# Altium PCB omnibothub-core.PcbDoc (part 2 of 2)
Units mil, origin at the board's own origin, x right, y up, seen from the top; angles counter-clockwise.
Board outline 2561.98 x 2230.57 mil, 4 copper layers (Top Layer, Mid-Layer 1, Mid-Layer 2, Bottom Layer); 77 components, 73 nets, 319 pads, 135 vias.
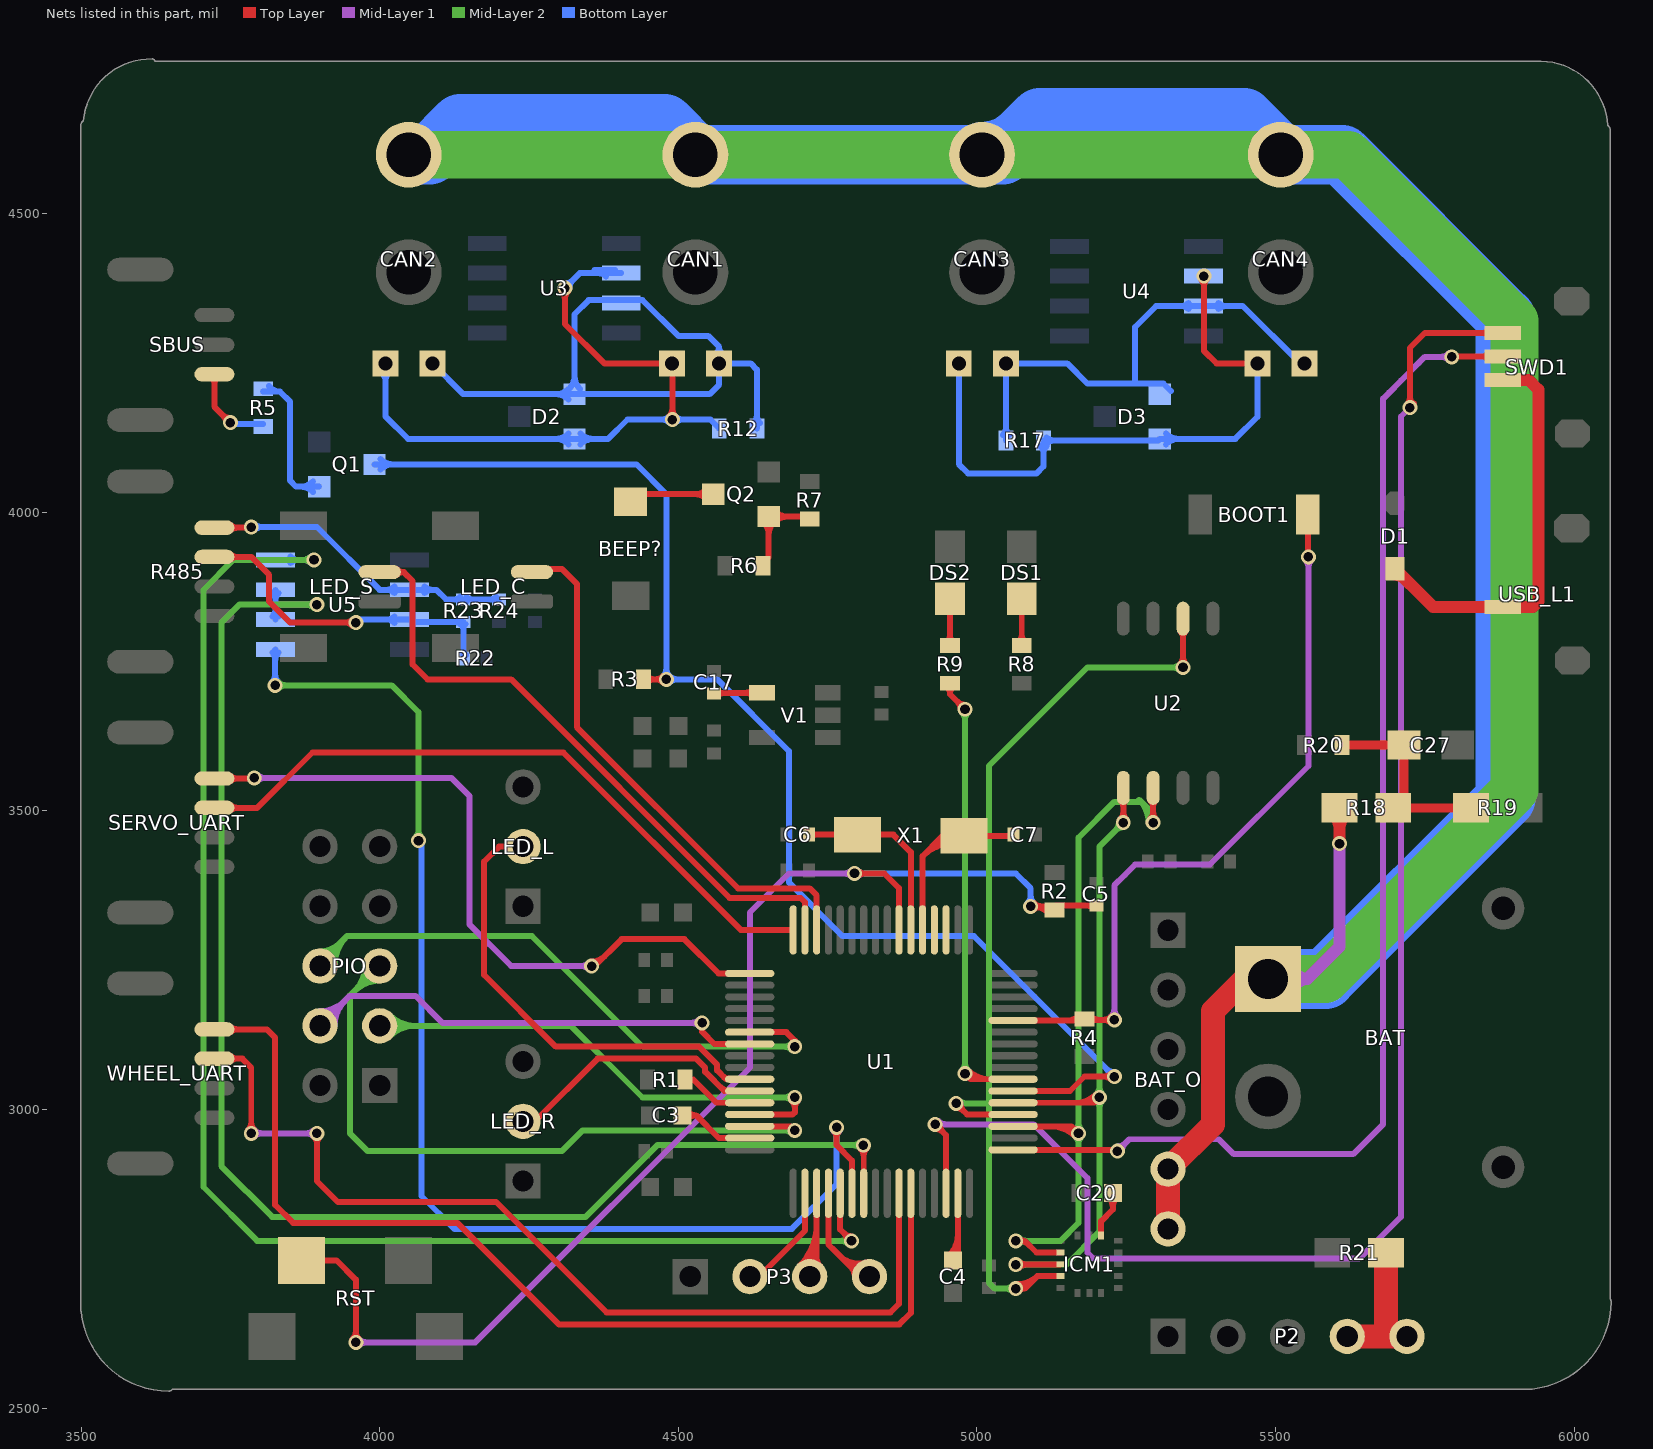
[diagram p4: the nets of this part, all layers, seen from the top]

## Via types
v1: diameter 25, hole 16, Top Layer to Bottom Layer, 129 vias
v2: diameter 244.09, hole 118.11, Top Layer to Bottom Layer, 4 vias
v3: diameter 244.09, hole 108.27, Top Layer to Bottom Layer, 2 vias

## Nets (pads, with @x,y where several pads share a name; then routed paths per layer and width w, separated by ;. In a path a pad name is that pad's centre, name@x,y a point inside that pad or via, vN(x,y) a via of type N, cw(c..) or ccw(c..) an arc to the next point about the centre after c; other vN are vias at no path point) (continued)
LED2: R9.1 U1.55 | length 927.1
  Top Layer w10: R9.1@4949.63,3708.16 cw(c4936.83,3695.36) 4954.94,3695.36 cw(c4973.04,3695.36) R9.1@4960.24,3708.16 ; R9.1@4954.94,3717.97 4954.94,3695.06 v1(4980,3670) ; v1@4972.5,3670 ccw(c4954.39,3670) 4967.2,3682.8 ccw(c4980,3695.61) v1@4980,3677.5 ; v1@4978.23,3058.23 ccw(c4996.97,3076.97) 4996.97,3050.47 ; v1(4980,3060) 4989.53,3050.47 U1.55@5060.47,3050.47 ; v1@4985.3,3065.3 ccw(c5021.11,3101.11) U1.55@5021.11,3050.47
  Mid-Layer 2 w10: v1@4974.7,3065.3 ccw(c4961.89,3078.11) 4980,3078.11 ccw(c4998.11,3078.11) v1@4985.3,3065.3 ; v1@4974.7,3664.7 cw(c4961.89,3651.89) 4980,3651.89 cw(c4998.11,3651.89) v1@4985.3,3664.7 ; v1(4980,3060) v1(4980,3670)
NetBEEP?_2: BEEP?.2 Q2.3 | length 192.1
  Top Layer w10: BEEP?.2@4420,4017.48 4432.52,4030 Q2.3@4558.74,4030 ; Q2.3@4548.76,4021.01 ccw(c4527.06,3999.3) 4527.06,4030 ccw(c4527.06,4060.7) Q2.3@4548.76,4038.99
NetBOOT1_2: BOOT1.2 R4.2 U1.60 | length 1360.4
  Top Layer w10: U1.60@5060.47,3148.9 5178.67,3148.9 5180.06,3147.5 5182.56,3150 v1(5230,3150) ; 5151.61,3148.9 ccw(c5151.61,3175.89) R4.2@5170.7,3156.8 ; R4.2@5189.3,3146.2 cw(c5198.49,3137.01) 5198.49,3150 ; R4.2@5189.3,3156.8 ccw(c5205.73,3173.23) 5205.73,3150 ; v1@5224.7,3144.7 ccw(c5211.89,3131.89) 5211.89,3150 ccw(c5211.89,3168.11) v1@5224.7,3155.3 ; BOOT1.2@5554,3996 5554,3926 v1(5555,3925)
  Mid-Layer 1 w10: v1@5224.7,3155.3 ccw(c5211.89,3168.11) 5230,3168.11 ccw(c5248.11,3168.11) v1@5235.3,3155.3 ; v1(5230,3150) 5230,3375 5247.5,3392.5 5265,3410 5390,3410 5555,3575 v1(5555,3925) ; v1@5549.7,3919.7 cw(c5536.89,3906.89) 5555,3906.89 cw(c5573.11,3906.89) v1@5560.3,3919.7
NetC3_1: C3.1 U1.31 | length 163.4
  Top Layer w10: C3.1@4507,2990 4530,2990 ; C3.1@4514.31,2983.18 cw(c4530,2968.55) 4530,2990 ; C3.1@4514.31,2996.82 ccw(c4530,3011.45) 4530,2990 ; U1.31@4619.53,2952.05 4567.95,2952.05 4530,2990
NetC4_1: C4.1 U1.47 | length 166.2
  Top Layer w10: C4.1@4952.93,2754.07 ccw(c4916.66,2790.34) 4967.95,2790.34 ; C4.1@4960,2747 ccw(c4940.8,2766.2) 4967.95,2766.2 ; C4.1@4967.95,2754.95 U1.47@4967.95,2859.53
NetC5_2: C5.2 R2.1 RST.1 U1.7 | length 2409.3
  Top Layer w10: RST.1@3869,2747 3928,2747 3960,2715 3960,2616 v1(3960,2610) ; v1@3954.7,2615.3 ccw(c3941.89,2628.11) 3960,2628.11 ccw(c3978.11,2628.11) v1@3965.3,2615.3 ; v1(4795,3395) 4845,3395 ; v1@4800.3,3389.7 cw(c4813.11,3376.89) 4813.11,3395 cw(c4813.11,3413.11) v1@4800.3,3400.3 ; 4815,3395 4845,3395 ; U1.7@4869.53,3300.47 4869.53,3370.47 4845,3395 ; v1(5090,3340) 5128,3340 R2.1@5130,3338 ; v1@5092.2,3340 cw(c5092.2,3299.7) R2.1@5120.7,3328.2 ; v1@5095.3,3334.7 cw(c5108.11,3321.89) 5108.11,3340 cw(c5108.11,3358.11) v1@5095.3,3345.3 ; R2.1@5133,3341 C5.2@5200,3341 ; C5.2@5194.65,3337.46 ccw(c5186.12,3328.93) 5186.12,3341 ccw(c5186.12,3353.07) C5.2@5194.65,3344.54
  Mid-Layer 1 w10: v1(3960,2610) 4160,2610 4620,3070 4620,3245 ; v1@3965.3,2604.7 cw(c3978.11,2591.89) 3978.11,2610 cw(c3978.11,2628.11) v1@3965.3,2615.3 ; 4620,3255 4620,3245 ; v1@4789.7,3389.7 ccw(c4776.89,3376.89) 4776.89,3395 ccw(c4776.89,3413.11) v1@4789.7,3400.3 ; v1(4795,3395) 4685,3395 4620,3330 4620,3245
  Bottom Layer w10: v1(4795,3395) 5065,3395 5090,3370 v1(5090,3340) ; v1@4800.3,3389.7 cw(c4813.11,3376.89) 4813.11,3395 cw(c4813.11,3413.11) v1@4800.3,3400.3 ; v1@5084.7,3345.3 ccw(c5071.89,3358.11) 5090,3358.11 ccw(c5108.11,3358.11) v1@5095.3,3345.3
NetC6_2: C6.2 U1.6 X1.1 | length 331.6
  Top Layer w10: C6.2@4719,3460 X1.1@4800,3460 4860,3460 4889.21,3430.79 U1.6@4889.21,3300.47 ; C6.2@4722.54,3456.46 cw(c4731.07,3447.93) 4731.07,3460 cw(c4731.07,3472.07) C6.2@4722.54,3463.54
NetC7_2: C7.2 U1.5 X1.2 | length 450.8
  Top Layer w10: U1.5@4908.9,3300.47 4908.9,3423.9 4943,3458 X1.2@4978,3458 5059,3458 C7.2@5061,3460 ; 4910.33,3425.33 cw(c4956.29,3379.36) X1.2@4965.99,3443.64 ; 4924.33,3439.33 cw(c4959.96,3403.7) X1.2@4967.48,3453.52 ; 4938.33,3453.33 cw(c4963.63,3428.03) X1.2@4968.97,3463.41 ; 5048.47,3458 ccw(c5048.47,3470.72) C7.2@5057.46,3461.72 ; 5049.39,3458 cw(c5049.39,3446.57) C7.2@5057.46,3454.65
NetC17_1: C17.1 V1.4 | length 123.3
  Top Layer w10: C17.1@4560,3696 4561.4,3697.4 V1.4@4639.88,3697.4 ; C17.1@4565.35,3692.46 cw(c4577.27,3680.55) 4577.27,3697.4 ; V1.4@4625.51,3691.89 ccw(c4612.2,3678.58) 4612.2,3697.4 ccw(c4612.2,3716.22) V1.4@4625.51,3702.91
NetC20_2: C20.2 ICM1.14 | length 117.1
  Top Layer w10: ICM1.14@5207.91,2788.86 5207.91,2812.91 5227.5,2832.5 C20.2@5227.5,2859.94 ; C20.2@5220.43,2852.86 cw(c5203.36,2835.79) 5227.5,2835.79 cw(c5251.64,2835.79) C20.2@5234.57,2852.86
NetC27_1: C27.1 R18.1 R19.2 R20.2 | length 350
  Top Layer w15: R20.2@5607.5,3609.94 5714.94,3609.94 C27.1@5715,3610 5715,3523 R18.1@5697,3505 R19.2@5827,3505
NetCAN1_3: CAN1.3 CAN2.3 D2.1 R12.2 U3.7 | length 1314.7
  Bottom Layer w10: CAN2.3@4088.36,4248.96 4139.92,4197.4 D2.1@4326.26,4197.4 4326.36,4197.5 4552.5,4197.5 4568.36,4213.36 CAN1.3@4568.36,4248.96 ; D2.1@4316.28,4188.41 ccw(c4294.58,4166.7) 4294.58,4197.4 ccw(c4294.58,4228.1) D2.1@4316.28,4206.39 ; D2.1@4317.27,4206.39 ccw(c4295.56,4228.1) 4326.26,4228.1 ccw(c4356.96,4228.1) D2.1@4335.25,4206.39 ; 4326.26,4217.4 4326.26,4270 ; 4326.26,4247.4 4326.26,4270 ; CAN1.3@4560.56,4263.67 ccw(c4553.69,4276.64) 4568.36,4276.64 ; CAN1.3@4576.16,4263.67 cw(c4583.03,4276.64) 4568.36,4276.64 ; R12.2@4626.2,4149.3 ccw(c4613.39,4162.11) 4631.5,4162.11 ccw(c4649.61,4162.11) R12.2@4636.8,4149.3 ; R12.2@4631.5,4140 4631.5,4238.5 4621.04,4248.96 CAN1.3@4568.36,4248.96 ; 4326.26,4270 4326.26,4331.26 4350,4355 4394.41,4355 4440,4355 4500,4295 4550,4295 4568.36,4276.64 ; CAN1.3@4568.36,4248.96 4568.36,4276.64
NetCAN1_4: CAN1.4 CAN2.4 D2.2 R12.1 U3.6 | length 1549.9
  Top Layer w10: v1@4304.7,4369.7 cw(c4291.89,4356.89) 4310,4356.89 cw(c4328.11,4356.89) v1@4315.3,4369.7 ; v1(4310,4375) 4310,4315 4376.04,4248.96 CAN1.4@4489.62,4248.96 4490,4248.58 v1(4490,4155) ; v1@4484.7,4160.3 ccw(c4471.89,4173.11) 4490,4173.11 ccw(c4508.11,4173.11) v1@4495.3,4160.3
  Bottom Layer w10: CAN2.4@4001.41,4234.47 cw(c3993.42,4220.38) 4009.62,4220.38 ; CAN2.4@4017.83,4234.47 ccw(c4025.82,4220.38) 4009.62,4220.38 ; v1(4310,4375) 4335,4400 U3.6@4404.41,4400 ; v1@4310,4382.5 ccw(c4310,4400.61) 4322.8,4387.8 ccw(c4335.61,4375) v1@4317.5,4375 ; D2.2@4316.28,4113.61 ccw(c4294.58,4091.9) 4294.58,4122.6 ccw(c4294.58,4153.3) D2.2@4316.28,4131.59 ; D2.2@4336.24,4113.61 cw(c4357.94,4091.9) 4357.94,4122.6 cw(c4357.94,4153.3) D2.2@4336.24,4131.59 ; U3.6@4378.32,4395.62 ccw(c4360,4382.42) 4360,4405 U3.6@4394.41,4405 ; U3.6@4379.11,4394.7 ccw(c4366.3,4381.89) 4366.3,4400 ccw(c4366.3,4418.11) U3.6@4379.11,4405.3 ; CAN1.4@4473.96,4248.96 CAN1.4@4489.62,4248.96 ; v1@4484.7,4149.7 ccw(c4471.89,4136.89) 4471.89,4155 ccw(c4471.89,4173.11) v1@4484.7,4160.3 ; v1@4495.3,4149.7 cw(c4508.11,4136.89) 4508.11,4155 cw(c4508.11,4173.11) v1@4495.3,4160.3 ; R12.1@4568.5,4140 4553.5,4155 v1(4490,4155) 4415,4155 4382.6,4122.6 D2.2@4326.26,4122.6 4047.4,4122.6 4009.62,4160.38 CAN2.4@4009.62,4248.96 4009.62,4220.38
NetCAN3_3: CAN3.3 CAN4.3 D3.1 R17.2 U4.7 | length 942.8
  Bottom Layer w10: R17.2@5043.2,4129.3 ccw(c5030.39,4142.11) 5048.5,4142.11 ccw(c5066.61,4142.11) R17.2@5053.8,4129.3 ; R17.2@5048.5,4120 5048.5,4248.82 CAN3.3@5048.36,4248.96 5151.04,4248.96 5185,4215 5265,4215 ; D3.1@5324.94,4202.5 5312.44,4215 5265,4215 ; U4.7@5354.11,4339.7 ccw(c5341.3,4326.89) 5341.3,4345 ccw(c5341.3,4363.11) U4.7@5354.11,4350.3 ; U4.7@5404.71,4339.7 cw(c5417.52,4326.89) 5417.52,4345 cw(c5417.52,4363.11) U4.7@5404.71,4350.3 ; CAN4.3@5548.36,4248.96 5541.04,4248.96 5445,4345 U4.7@5379.41,4345 5300,4345 5265,4310 5265,4215
NetCAN3_4: CAN3.4 CAN4.4 D3.2 R17.1 U4.6 | length 1186.4
  Top Layer w10: v1@5374.7,4389.7 cw(c5361.89,4376.89) 5380,4376.89 cw(c5398.11,4376.89) v1@5385.3,4389.7 ; v1(5380,4395) 5380,4270 5401.04,4248.96 CAN4.4@5469.62,4248.96
  Bottom Layer w10: CAN3.4@4969.62,4248.96 4969.62,4080.38 4985,4065 5100,4065 5111.5,4076.5 R17.1@5111.5,4120 5303.66,4120 D3.2@5306.26,4122.6 5432.6,4122.6 5469.62,4159.62 CAN4.4@5469.62,4248.96 ; R17.1@5106.2,4110.7 cw(c5093.39,4097.89) 5111.5,4097.89 cw(c5129.61,4097.89) R17.1@5116.8,4110.7 ; R17.1@5116.8,4114.7 cw(c5129.61,4101.89) 5129.61,4120 cw(c5129.61,4138.11) R17.1@5116.8,4125.3 ; D3.2@5316.24,4113.61 cw(c5337.94,4091.9) 5337.94,4122.6 cw(c5337.94,4153.3) D3.2@5316.24,4131.59 ; U4.6@5379.41,4395 v1(5380,4395)
NetD1_1: D1.1 SWD1.3 USB_L1.3 | length 759.8
  Top Layer w20: D1.1@5700,3904 5723.37,3880.63 ; D1.1@5700,3904.88 5763.62,3841.26 USB_L1.3@5880,3841.26 5931.26,3841.26 5940,3850 5940,4205 5923.74,4221.26 SWD1.3@5880,4221.26 ; D1.1@5715.03,3888.97 ccw(c5700,3873.94) 5700,3895.2 cw(c5700,3871.82) 5716.53,3888.35
NetDS1_1: DS1.1 R8.2 | length 111
  Top Layer w10: R8.2@5069.63,3781.77 ccw(c5056.67,3794.73) 5075,3794.73 ; R8.2@5075,3772.47 DS1.1@5075,3855 ; 5075,3794.42 ccw(c5092.89,3794.42) R8.2@5080.24,3781.77
NetDS2_1: DS2.1 R9.2 | length 111
  Top Layer w10: R9.2@4949.63,3781.77 ccw(c4936.67,3794.73) 4955,3794.73 ; R9.2@4955,3772.47 DS2.1@4955,3855 ; 4955,3794.42 ccw(c4972.89,3794.42) R9.2@4960.24,3781.77
NetP2_4: P2.4 P2.5 R21.1 | length 240
  Top Layer w40: P2.4@5620,2620 5685,2620 ; R21.1@5685,2760 5685,2620 ; P2.5@5720,2620 5685,2620
NetQ1_2: Q1.2 R5.1 | length 306.4
  Bottom Layer w10: R5.1@3805,4202 3833,4202 ; R5.1@3815,4211 ccw(c3833,4224.5) 3833,4202 ; Q1.2@3888.76,4033.61 ccw(c3867.06,4011.9) 3867.06,4042.6 ccw(c3867.06,4073.3) Q1.2@3888.76,4051.59 ; Q1.2@3898.74,4042.6 3860,4042.6 3850,4052.6 3850,4185 3833,4202
NetQ2_2: Q2.2 R6.1 R7.2 | length 253.7
  Top Layer w10: R6.1@4637,3910 4651.26,3924.26 Q2.2@4651.26,3992.6 4719.84,3992.6 R7.2@4719.94,3992.5 ; Q2.2@4642.27,3983.61 cw(c4620.56,3961.9) 4651.26,3961.9 cw(c4681.96,3961.9) Q2.2@4660.25,3983.61 ; Q2.2@4661.24,3983.61 cw(c4682.94,3961.9) 4682.94,3992.6 cw(c4682.94,4023.3) Q2.2@4661.24,4001.59
NetR1_2: R1.2 U1.28 | length 145.2
  Top Layer w10: R1.2@4507.5,3049.94 R1.2@4511.5,3049.94 ; R1.2@4511.5,3050 4525,3050 ; R1.2@4517.87,3046.04 cw(c4525,3041.6) 4525,3050 ; R1.2@4517.87,3053.96 ccw(c4525,3058.4) 4525,3050 ; U1.28@4619.53,3011.1 4563.9,3011.1 4525,3050
NetR5_2: R5.2 SBUS.1 | length 202.9
  Top Layer w10: SBUS.1@3718.33,4225.84 cw(c3706.38,4213.89) 3723.28,4213.89 cw(c3740.18,4213.89) SBUS.1@3728.23,4225.84 ; SBUS.1@3723.28,4230.79 3723.28,4176.72 v1(3750,4150) ; v1@3742.5,4150 ccw(c3724.39,4150) 3737.2,4162.8 ccw(c3750,4175.61) v1@3750,4157.5
  Bottom Layer w10: v1(3750,4150) 3752.5,4147.5 R5.2@3805.06,4147.5
NetR22_2: R22.2 R23.1 R485.3 U5.7 | length 687.3
  Top Layer w10: R485.3@3723.28,3925 3785,3925 3815,3895 3815,3850 3850,3815 v1(3960,3815) ; R485.3@3749.73,3920.05 cw(c3761.68,3908.1) 3761.68,3925 cw(c3761.68,3941.9) R485.3@3749.73,3929.95 ; v1@3954.7,3809.7 ccw(c3941.89,3796.89) 3941.89,3815 ccw(c3941.89,3833.11) v1@3954.7,3820.3
  Bottom Layer w10: v1(3960,3815) 3965,3820 U5.7@4050,3820 4054,3816 R23.1@4140,3816 4140,3756 R22.2@4141,3755 ; U5.7@4024.7,3814.7 ccw(c4011.89,3801.89) 4011.89,3820 ccw(c4011.89,3838.11) U5.7@4024.7,3825.3 ; R23.1@4134.65,3812.46 ccw(c4126.12,3803.93) 4126.12,3816 ccw(c4126.12,3828.07) R23.1@4134.65,3819.54 ; R23.1@4136.46,3812.46 cw(c4127.93,3803.93) 4140,3803.93 cw(c4152.07,3803.93) R23.1@4143.54,3812.46 ; 4140,3771.3 ccw(c4155.49,3771.3) R22.2@4144.54,3760.35
NetR23_2: R23.2 R24.1 R485.4 U5.6 | length 696
  Top Layer w10: R485.4@3723.28,3974 3784,3974 v1(3785,3975) ; R485.4@3749.73,3969.05 cw(c3761.68,3957.1) 3761.68,3974 cw(c3761.68,3990.9) R485.4@3749.73,3978.95
  Bottom Layer w10: v1(3785,3975) 3895,3975 4000,3870 U5.6@4050,3870 4095,3870 4111,3854 R23.2@4140,3854 R24.1@4200,3854 ; v1@3790.3,3969.7 cw(c3803.11,3956.89) 3803.11,3975 cw(c3803.11,3993.11) v1@3790.3,3980.3 ; U5.6@4024.7,3864.7 ccw(c4011.89,3851.89) 4011.89,3870 ccw(c4011.89,3888.11) U5.6@4024.7,3875.3 ; U5.6@4075.3,3864.7 cw(c4088.11,3851.89) 4088.11,3870 cw(c4088.11,3888.11) U5.6@4075.3,3875.3 ; R23.2@4134.65,3850.46 ccw(c4126.12,3841.93) 4126.12,3854 ccw(c4126.12,3866.07) R23.2@4134.65,3857.54 ; R23.2@4145.35,3850.46 cw(c4153.88,3841.93) 4153.88,3854 cw(c4153.88,3866.07) R23.2@4145.35,3857.54 ; R24.1@4194.65,3850.46 ccw(c4186.12,3841.93) 4186.12,3854 ccw(c4186.12,3866.07) R24.1@4194.65,3857.54
POWER: BAT.1 BAT_O.5 BAT_O.6 CAN1.1 CAN2.1 CAN3.1 CAN4.1 R18.2 | length 7786.6
  Top Layer w20: R18.2@5596.39,3494.39 cw(c5570.79,3468.79) 5607,3468.79 cw(c5643.21,3468.79) R18.2@5617.61,3494.39 ; v1(5607,3445) R18.2@5607,3505
  Top Layer w40: BAT_O.6@5320,2800 BAT_O.5@5320,2900 5395,2975 5395,3165 5448.43,3218.43 BAT.1@5487.32,3218.43
  Mid-Layer 1 w20: BAT.1@5447.32,3218.43 5553.43,3218.43 5607,3272 v1(5607,3445) ; BAT.1@5529.34,3201.99 cw(c5553.42,3192.56) 5553.42,3218.43 cw(c5553.42,3244.29) BAT.1@5529.34,3234.86
  Mid-Layer 2 w80: CAN2.1@4048.58,4598.43 CAN1.1@4528.58,4598.43 CAN3.1@5008.58,4598.43 CAN4.1@5508.58,4598.43 5621.57,4598.43 5900,4320 5900,3920 5900,3850 5900,3535 5583.43,3218.43 BAT.1@5487.32,3218.43
  Bottom Layer w100: CAN2.1@4048.58,4598.43 4083.43,4598.43 4135,4650 4477.01,4650 CAN1.1@4528.58,4598.43 CAN3.1@5008.58,4598.43 5043.43,4598.43 5105,4660 5447.01,4660 CAN4.1@5508.58,4598.43 5611.57,4598.43 5885,4325 5885,3520 5583.43,3218.43 BAT.1@5487.32,3218.43 ; CAN3.1@5008.58,4603.54 ccw(c5008.58,4700.02) 5076.8,4631.8
PWM1: LED_C.2 U1.14 | length 931.4
  Top Layer w10: LED_C.2@4255,3904.61 4305.39,3904.61 4330,3880 4330,3640 4600,3370 4680,3370 ; 4650,3370 4680,3370 ; U1.14@4731.73,3300.47 4731.73,3358.27 4720,3370 4680,3370
PWM2: LED_S.2 U1.15 | length 1095.3
  Top Layer w10: LED_S.2@4000,3899.61 4040.39,3899.61 4055,3885 4055,3745 4080,3720 4220,3720 4586,3354 4705,3354 4712.05,3346.95 U1.15@4712.05,3300.47 ; LED_S.2@4028.44,3894.79 cw(c4040.07,3883.16) 4040.07,3899.61 cw(c4040.07,3916.05) LED_S.2@4028.44,3904.42
PWM7: LED_L.2 U1.26 | length 797.6
  Top Layer w10: LED_L.2@4240,3440 4200,3440 4175,3415 4175,3225 4295,3105 4535,3105 4565,3075 4565,3065.34 4579.87,3050.47 U1.26@4619.53,3050.47 ; 4575.34,3055 ccw(c4584.09,3063.76) U1.26@4584.09,3051.38
PWM8: LED_R.2 U1.27 | length 465
  Top Layer w10: LED_R.2@4240,2980 4260,2980 4365,3085 4530,3085 4545,3070 4545,3062.72 4576.93,3030.79 U1.27@4619.53,3030.79 ; 4570.32,3037.4 ccw(c4584.09,3051.18) U1.27@4584.09,3031.69
RX485: U1.37 U5.4 | length 2622
  Top Layer w10: U1.37@4771.1,2859.53 4771.1,2798.9 v1(4790,2780) ; v1@4782.5,2780 ccw(c4764.39,2780) 4777.2,2792.8 ccw(c4790,2805.61) v1@4790,2787.5
  Mid-Layer 2 w10: v1@3884.7,3914.7 ccw(c3871.89,3901.89) 3871.89,3920 ccw(c3871.89,3938.11) v1@3884.7,3925.3 ; v1(3890,3920) 3755,3920 3705,3870 3705,2870 3795,2780 4765,2780 v1(4790,2780) ; v1@4784.7,2774.7 ccw(c4771.89,2761.89) 4771.89,2780 ccw(c4771.89,2798.11) v1@4784.7,2785.3
  Bottom Layer w10: U5.4@3825.59,3920 v1(3890,3920) ; U5.4@3850.89,3914.7 cw(c3863.7,3901.89) 3863.7,3920 cw(c3863.7,3938.11) U5.4@3850.89,3925.3 ; v1@3884.7,3914.7 ccw(c3871.89,3901.89) 3871.89,3920 ccw(c3871.89,3938.11) v1@3884.7,3925.3
SBUS: Q1.3 R3.1 U1.54 | length 2415.2
  Top Layer w10: R3.1@4437,3720 v1(4480,3720) ; R3.1@4446.8,3714.7 cw(c4459.61,3701.89) 4459.61,3720 cw(c4459.61,3738.11) R3.1@4446.8,3725.3 ; v1@4474.7,3714.7 ccw(c4461.89,3701.89) 4461.89,3720 ccw(c4461.89,3738.11) v1@4474.7,3725.3 ; U1.54@5060.47,3030.79 5155.79,3030.79 5180,3055 v1(5230,3055) ; v1@5224.7,3049.7 ccw(c5211.89,3036.89) 5211.89,3055 ccw(c5211.89,3073.11) v1@5224.7,3060.3
  Bottom Layer w10: Q1.3@3991.26,4080 4430,4080 4480,4030 v1(4480,3720) 4565,3720 4685,3600 4685,3380 4775,3290 4995,3290 v1(5230,3055) ; Q1.3@4001.24,4071.01 cw(c4022.94,4049.3) 4022.94,4080 cw(c4022.94,4110.7) Q1.3@4001.24,4088.99 ; v1@4474.7,3725.3 ccw(c4461.89,3738.11) 4480,3738.11 ccw(c4498.11,3738.11) 4485.3,3725.3 ccw(c4498.11,3738.11) 4498.11,3720 ccw(c4498.11,3701.89) v1@4485.3,3714.7 ; v1@5222.5,3055 ccw(c5204.39,3055) 5217.2,3067.8 ccw(c5230,3080.61) v1@5230,3062.5
SCL_B: U1.3
SCL_P: PIO.6 U1.22 | length 1158
  Top Layer w10: U1.22@4619.53,3129.21 4680.79,3129.21 4695,3115 v1(4695,3105) ; 4692.4,3117.6 cw(c4680.1,3105.29) v1@4697.5,3104.95
  Mid-Layer 2 w10: PIO.6@3900,3240 3900,3245 3945,3290 ; PIO.6@3900,3264.53 ccw(c3900,3311.67) 3933.34,3278.34 ; PIO.6@3914.53,3240.09 cw(c3960.77,3240.37) 3928.07,3273.07 ; PIO.6@3924.53,3240.15 cw(c3994.42,3240.58) 3945,3290 ; v1@4689.7,3099.7 ccw(c4676.89,3086.89) 4676.89,3105 ccw(c4676.89,3123.11) v1@4689.7,3110.3 ; v1(4695,3105) 4440,3105 4255,3290 3945,3290
SCLK_FC: SWD1.2 U1.49 | length 2186.8
  Top Layer w10: U1.49@5060.47,2932.36 5232.64,2932.36 v1(5235,2930) ; v1(5795,4260) 5795.63,4260.63 SWD1.2@5880,4260.63 ; SWD1.2@5856.48,4255.81 ccw(c5844.86,4244.19) 5844.86,4260.63 ccw(c5844.86,4277.07) SWD1.2@5856.48,4265.45
  Mid-Layer 1 w10: v1(5235,2930) 5255,2950 5405,2950 5430,2925 5630,2925 5680,2975 5680,4190 5690,4200 5710,4220 5740,4250 5750,4260 v1(5795,4260) ; v1@5235,2937.5 ccw(c5235,2955.61) 5247.8,2942.8 ccw(c5260.61,2930) v1@5242.5,2930 ; v1@5789.7,4254.7 ccw(c5776.89,4241.89) 5776.89,4260 ccw(c5776.89,4278.11) v1@5789.7,4265.3
SDA_B: U1.4
SDA_P: PIO.4 U1.23 | length 958.9
  Top Layer w10: v1(4540,3145) 4540,3130 4560.47,3109.53 U1.23@4619.53,3109.53
  Mid-Layer 1 w10: PIO.4@3900,3140 3950,3190 4060,3190 4105,3145 v1(4540,3145) ; PIO.4@3900,3154.53 ccw(c3900,3189.6) 3924.8,3164.8 ccw(c3949.6,3140) PIO.4@3914.53,3140 ; PIO.4@3900,3164.53 ccw(c3900,3223.74) 3941.87,3181.87 ccw(c3983.74,3140) PIO.4@3924.53,3140 ; v1@4534.7,3139.7 ccw(c4521.89,3126.89) 4521.89,3145 ccw(c4521.89,3163.11) v1@4534.7,3150.3
SPI2_CK: P3.2 U1.34 | length 171.4
  Top Layer w10: P3.2@4635,2720 4712.05,2797.05 U1.34@4712.05,2859.53
SPI2_SI: P3.4 U1.36 | length 263.6
  Top Layer w10: U1.36@4751.42,2859.53 4751.42,2773.58 4762.5,2762.5 P3.4@4805,2720 ; 4770,2755 ccw(c4801.43,2786.43) P3.4@4813.4,2743.62 ; 4782.1,2742.9 ccw(c4806.72,2767.52) P3.4@4816.09,2733.99 ; 4788.74,2736.26 cw(c4772.47,2720) P3.4@4795.47,2720
SPI2_SO: P3.3 U1.35 | length 336.5
  Top Layer w10: P3.3@4702.66,2737.34 ccw(c4632.46,2807.54) 4731.73,2807.54 ; P3.3@4709.73,2730.27 ccw(c4656.6,2783.4) 4731.73,2783.4 ; P3.3@4716.8,2723.2 ccw(c4680.75,2759.25) 4731.73,2759.25 ; P3.3@4720,2720 4731.73,2731.73 U1.35@4731.73,2859.53 ; 4731.73,2750.89 ccw(c4750.89,2750.89) P3.3@4737.34,2737.34
SPI3_CK: ICM1.2 U1.51 U2.6 | length 1489.7
  Top Layer w10: U1.51@5060.47,2971.73 5158.27,2971.73 v1(5170,2960) ; v1(5065,2780) 5080,2780 5099.69,2760.32 ICM1.2@5140,2760.32 ; v1@5065,2782.5 cw(c5065,2752.32) 5086.34,2773.66 ; 5123.57,2971.73 cw(c5123.57,2913.57) v1@5164.7,2954.7 ; 5147.71,2971.73 cw(c5147.71,2937.71) v1@5171.77,2961.77 ; v1@5289.7,3485.3 ccw(c5276.89,3498.11) 5295,3498.11 ccw(c5313.11,3498.11) v1@5300.3,3485.3 ; U2.6@5290.88,3516.43 cw(c5280.93,3506.48) 5295,3506.48 cw(c5309.07,3506.48) U2.6@5299.12,3516.43 ; v1(5295,3480) U2.6@5295,3538.27
  Mid-Layer 2 w10: v1(5065,2780) 5140,2780 5170,2810 v1(5170,2960) 5170,3455 5230,3515 5275,3515 5295,3495 v1(5295,3480) ; v1@5070.3,2774.7 cw(c5083.11,2761.89) 5083.11,2780 cw(c5083.11,2798.11) v1@5070.3,2785.3 ; v1@5164.7,2954.7 cw(c5151.89,2941.89) 5170,2941.89 cw(c5188.11,2941.89) v1@5175.3,2954.7 ; v1@5164.7,2965.3 ccw(c5151.89,2978.11) 5170,2978.11 ccw(c5188.11,2978.11) v1@5175.3,2965.3 ; 5271.59,3518.41 cw(c5233.18,3480) v1@5287.5,3480 ; 5288.66,3501.34 cw(c5267.32,3480) v1@5297.5,3480
SPI3_SI: ICM1.3 U1.53 U2.5 | length 1396
  Top Layer w10: U1.53@5060.47,3011.1 5196.1,3011.1 v1(5205,3020) ; v1(5065,2740) 5065.63,2740.63 ICM1.3@5140,2740.63 ; v1@5070.3,2734.7 cw(c5084.63,2720.37) 5084.63,2740.63 ; v1@5070.3,2745.3 ccw(c5081.59,2756.59) 5081.59,2740.63 ; 5165.41,3011.1 ccw(c5165.41,3059.59) v1@5199.7,3025.3 ; 5189.55,3011.1 ccw(c5189.55,3035.45) v1@5206.77,3018.23 ; v1@5239.7,3485.3 ccw(c5226.89,3498.11) 5245,3498.11 ccw(c5263.11,3498.11) v1@5250.3,3485.3 ; U2.5@5240.88,3516.43 cw(c5230.93,3506.48) 5245,3506.48 cw(c5259.07,3506.48) U2.5@5249.12,3516.43 ; v1(5245,3480) U2.5@5245,3538.27
  Mid-Layer 2 w10: v1(5065,2740) 5150,2740 5205,2795 v1(5205,3020) 5205,3440 v1(5245,3480) ; v1@5070.3,2734.7 cw(c5083.11,2721.89) 5083.11,2740 cw(c5083.11,2758.11) v1@5070.3,2745.3 ; v1@5199.7,3014.7 cw(c5186.89,3001.89) 5205,3001.89 cw(c5223.11,3001.89) v1@5210.3,3014.7 ; v1@5199.7,3025.3 ccw(c5186.89,3038.11) 5205,3038.11 ccw(c5223.11,3038.11) v1@5210.3,3025.3 ; v1@5237.5,3480 cw(c5219.39,3480) 5232.2,3467.2 cw(c5245,3454.39) v1@5245,3472.5
SPI3_SO: ICM1.4 U1.52 U2.2 | length 1861.9
  Top Layer w10: v1@4965,3002.5 cw(c4965,2984.39) 4977.8,2997.2 cw(c4990.61,3010) v1@4972.5,3010 ; v1(4965,3010) 4983.58,2991.42 U1.52@5060.47,2991.42 ; v1@5064.85,2697.5 ccw(c5066.46,2724.01) 5085.23,2705.23 ; v1(5065,2700) 5080,2700 5100.94,2720.95 ; v1@5065.45,2707.49 ccw(c5068.25,2753.64) 5100.94,2720.94 ; ICM1.4@5140,2720.95 5100.94,2720.95 ; v1@5339.7,3745.3 ccw(c5326.89,3758.11) 5345,3758.11 ccw(c5363.11,3758.11) v1@5350.3,3745.3 ; U2.2@5340.88,3799.9 cw(c5330.93,3789.95) 5345,3789.95 cw(c5359.07,3789.95) U2.2@5349.12,3799.9 ; v1(5345,3740) U2.2@5345,3821.73
  Mid-Layer 2 w10: v1(4965,3010) 5020,3010 ; v1@4970.3,3004.7 cw(c4983.11,2991.89) 4983.11,3010 cw(c4983.11,3028.11) v1@4970.3,3015.3 ; v1@5059.7,2694.7 ccw(c5046.89,2681.89) 5046.89,2700 ccw(c5046.89,2718.11) v1@5059.7,2705.3 ; v1(5065,2700) 5030,2700 5020,2710 5020,3120 5020,3575 5185,3740 v1(5345,3740) v1@5350,3740 ; v1@5339.7,3734.7 ccw(c5326.89,3721.89) 5326.89,3740 ccw(c5326.89,3758.11) v1@5339.7,3745.3
SWD_FC: SWD1.1 U1.46 | length 2845.9
  Top Layer w10: v1@4930,2967.5 cw(c4930,2949.39) 4942.8,2962.2 cw(c4955.61,2975) v1@4937.5,2975 ; v1(4930,2975) 4948.27,2956.73 U1.46@4948.27,2859.53 ; v1@5719.7,4180.3 ccw(c5706.89,4193.11) 5725,4193.11 ccw(c5743.11,4193.11) v1@5730.3,4180.3 ; v1@5731.89,4181.89 v1(5725,4175) 5725,4275 5750,4300 SWD1.1@5880,4300 ; SWD1.1@5856.48,4295.18 ccw(c5844.86,4283.56) 5844.86,4300 ccw(c5844.86,4316.44) SWD1.1@5856.48,4304.82
  Mid-Layer 1 w10: v1(4930,2975) 5095,2975 5185,2885 5185,2760 5195,2750 5640,2750 5710,2820 5710,4160 v1(5725,4175) ; v1@4935.3,2969.7 cw(c4948.11,2956.89) 4948.11,2975 cw(c4948.11,2993.11) v1@4935.3,2980.3
TX485: U1.38 U5.1 | length 2267.4
  Top Layer w10: v1@4759.7,2964.7 cw(c4746.89,2951.89) 4765,2951.89 cw(c4783.11,2951.89) v1@4770.3,2964.7 ; v1(4765,2970) 4765,2940 4790.79,2914.21 U1.38@4790.79,2859.53
  Mid-Layer 2 w10: v1(3825,3710) 4020,3710 4065,3665 v1(4065,3450) ; v1@3830.3,3704.7 cw(c3843.11,3691.89) 3843.11,3710 cw(c3843.11,3728.11) v1@3830.3,3715.3 ; v1@4059.7,3455.3 ccw(c4046.89,3468.11) 4065,3468.11 ccw(c4083.11,3468.11) v1@4070.3,3455.3
  Bottom Layer w10: v1@3819.7,3715.3 ccw(c3806.89,3728.11) 3825,3728.11 ccw(c3843.11,3728.11) v1@3830.3,3715.3 ; U5.1@3820.29,3764.7 cw(c3808.91,3753.32) 3825,3753.32 ; 3825,3750.47 cw(c3845.12,3750.47) U5.1@3830.89,3764.7 ; v1@3825.59,3710.59 v1(3825,3710) 3825,3769.41 U5.1@3825.59,3770 ; v1(4065,3450) 4070,3445 4070,2855 4125,2800 4685,2800 4690,2800 4765,2875 v1(4765,2970) ; v1@4759.7,2964.7 cw(c4746.89,2951.89) 4765,2951.89 cw(c4783.11,2951.89) v1@4770.3,2964.7
TX485_RE: U1.39 U5.2 U5.3 | length 2612.4
  Top Layer w10: v1@4804.7,2934.7 cw(c4790.75,2920.75) 4810.47,2920.75 ; U1.39@4810.47,2859.53 v1@4810.47,2939.53 ; 4810.47,2923.03 cw(c4826.97,2923.03) v1@4815.3,2934.7
  Mid-Layer 2 w10: v1@3889.7,3839.7 ccw(c3876.89,3826.89) 3876.89,3845 ccw(c3876.89,3863.11) v1@3889.7,3850.3 ; v1(3895,3845) 3765,3845 3735,3815 3735,2905 3820,2820 4345,2820 4465,2940 v1(4810,2940) ; v1@4804.7,2934.7 ccw(c4791.89,2921.89) 4791.89,2940 ccw(c4791.89,2958.11) v1@4804.7,2945.3
  Bottom Layer w10: U5.2@3820.29,3825.3 ccw(c3807.48,3838.11) 3825.59,3838.11 ccw(c3843.7,3838.11) U5.2@3830.89,3825.3 ; U5.3@3820.29,3864.7 cw(c3807.48,3851.89) 3825.59,3851.89 cw(c3843.7,3851.89) U5.3@3830.89,3864.7 ; U5.2@3825.59,3820 3825.59,3845 ; U5.3@3825.59,3870 3825.59,3845 ; v1@3889.7,3839.7 ccw(c3876.89,3826.89) 3876.89,3845 ccw(c3876.89,3863.11) v1@3889.7,3850.3 ; v1(3895,3845) 3825.59,3845
UART1_R_1: U1.43 WHEEL_UART.4 | length 1769.4
  Top Layer w10: WHEEL_UART.4@3723.28,3134 3811,3134 3825,3120 3825,2840 3855,2810 4070,2810 4130,2810 4300,2640 4870,2640 4889.21,2659.21 U1.43@4889.21,2859.53 ; WHEEL_UART.4@3749.73,3129.05 cw(c3761.68,3117.1) 3761.68,3134 cw(c3761.68,3150.9) WHEEL_UART.4@3749.73,3138.95
UART1_T_1: U1.42 WHEEL_UART.3 | length 1764.9
  Top Layer w10: WHEEL_UART.3@3723.28,3085 3770,3085 3785,3070 v1(3785,2960) ; WHEEL_UART.3@3749.73,3080.05 cw(c3761.68,3068.1) 3761.68,3085 cw(c3761.68,3101.9) WHEEL_UART.3@3749.73,3089.95 ; v1@3779.7,2965.3 ccw(c3766.89,2978.11) 3785,2978.11 ccw(c3803.11,2978.11) v1@3790.3,2965.3 ; v1@3889.7,2954.7 cw(c3876.89,2941.89) 3895,2941.89 cw(c3913.11,2941.89) v1@3900.3,2954.7 ; v1(3895,2960) 3895,2880 3930,2845 4080,2845 4195,2845 4380,2660 4855,2660 4869.53,2674.53 U1.42@4869.53,2859.53
  Mid-Layer 1 w10: v1(3785,2960) v1(3895,2960) ; v1@3790.3,2954.7 cw(c3803.11,2941.89) 3803.11,2960 cw(c3803.11,2978.11) v1@3790.3,2965.3 ; v1@3889.7,2954.7 ccw(c3876.89,2941.89) 3876.89,2960 ccw(c3876.89,2978.11) v1@3889.7,2965.3
UART2_R_1: SERVO_UART.4 U1.17 | length 1302.6
  Top Layer w10: SERVO_UART.4@3723.28,3554 3789,3554 v1(3790,3555) ; SERVO_UART.4@3749.73,3549.05 cw(c3761.68,3537.1) 3761.68,3554 cw(c3761.68,3570.9) SERVO_UART.4@3749.73,3558.95 ; v1(4355,3240) 4360,3240 4405,3285 4510,3285 4567.36,3227.64 U1.17@4619.53,3227.64 ; v1@4355,3247.5 ccw(c4355,3277.68) 4376.34,3256.34
  Mid-Layer 1 w10: v1(3790,3555) 4120,3555 4150,3525 4150,3310 4220,3240 v1(4355,3240) ; v1@3795.3,3549.7 cw(c3808.11,3536.89) 3808.11,3555 cw(c3808.11,3573.11) v1@3795.3,3560.3 ; v1@4349.7,3234.7 ccw(c4336.89,3221.89) 4336.89,3240 ccw(c4336.89,3258.11) v1@4349.7,3245.3
UART2_T_1: SERVO_UART.3 U1.16 | length 1157
  Top Layer w10: SERVO_UART.3@3723.28,3505 3795,3505 3887.5,3597.5 4307.5,3597.5 4604.53,3300.47 U1.16@4692.36,3300.47 ; SERVO_UART.3@3749.73,3500.05 cw(c3761.68,3488.1) 3761.68,3505 cw(c3761.68,3521.9) SERVO_UART.3@3749.73,3509.95
UART3_R_1: PIO.5 U1.30 | length 1327.4
  Top Layer w10: U1.30@4619.53,2971.73 4688.27,2971.73 v1(4695,2965)
  Mid-Layer 2 w10: PIO.5@3975.47,3240 cw(c3916.26,3240) 3958.13,3198.13 cw(c4000,3156.26) PIO.5@4000,3215.47 ; PIO.5@3985.47,3240 cw(c3950.4,3240) 3975.2,3215.2 cw(c4000,3190.4) PIO.5@4000,3225.47 ; PIO.5@4000,3240 3950,3190 3950,2960 3980,2930 4305,2930 4340,2965 v1(4695,2965) ; v1@4689.7,2959.7 ccw(c4676.89,2946.89) 4676.89,2965 ccw(c4676.89,2983.11) v1@4689.7,2970.3
UART3_T_1: PIO.3 U1.29 | length 1051.7
  Top Layer w10: U1.29@4619.53,2991.42 4691.42,2991.42 4695,2995 v1(4695,3020) ; v1@4689.7,3014.7 cw(c4676.89,3001.89) 4695,3001.89 cw(c4713.11,3001.89) v1@4700.3,3014.7
  Mid-Layer 2 w10: PIO.3@4000,3140 4320,3140 4440,3020 v1(4695,3020) ; PIO.3@4010.27,3129.73 cw(c4035.07,3104.93) 4035.07,3140 cw(c4035.07,3175.07) PIO.3@4010.27,3150.27 ; PIO.3@4017.34,3122.66 cw(c4059.21,3080.79) 4059.21,3140 cw(c4059.21,3199.21) PIO.3@4017.34,3157.34 ; v1@4689.7,3014.7 ccw(c4676.89,3001.89) 4676.89,3020 ccw(c4676.89,3038.11) v1@4689.7,3025.3
pads on no net: BAT.MP1 BAT.MP2 ICM1.7 LED_C.A LED_S.A P2.1 P2.2 R485.GND RST. SBUS.GND SERVO_UART.GND SWD1.1. SWD1.A U1.2 U1.33 U1.40 U1.50 U3.5 U4.5 USB_L1.1. USB_L1.A WHEEL_UART.GND
copper on no net:
  other v1: 5070,3285 5395,4210
  other v2: 3625,2680 5910,2680 3625,4610 5910,4610
  other v3: 3625,2680 5910,2680

## Polygon pours and split planes (outlines as drawn)
GND on Top Layer "Top Layer-No Net" (solid, remove dead copper, pour order 1000): 3212.59,4890.13 3212.59,2231.7 3217.59,2225.13 3337.59,2382.67 6077.59,2382.67 6077.59,4680.08 5922.59,4883.57
GND on Bottom Layer "Top Layer-No Net" (solid, remove dead copper, pour order 1001): 3605.52,4871.63 3555.52,4805.86 3555.52,2398.6 6205.52,2398.6 6235.52,2438.07 6325.52,2556.46 6325.52,4891.36

## Keep-outs
Keep-Out Layer:
  lines w10: 3508.72,4647.84 cw(c3616.73,4645.79) 3618.79,4753.81 ; 3595,4750 5945,4749.92 ; 5945,4750 cw(c5942.94,4641.98) 6050.96,4639.92
  lines w15: 3646.51,2537.2 5082.2,2537.2 5090,2545 5090,2620 5100,2630 5235,2630 5250,2615 5250,2545 5255,2540 5915,2540
  lines w17.87: 3508.72,2663.81 3508.72,4647.84 ; 3508.72,2675 ccw(c3646.51,2675) 3646.51,2537.2 ; 5915,2540 ccw(c5915,2677.8) 6052.8,2677.8 ; 6051.26,2675 6051.26,4639.92

## Silkscreen, mask and mechanical layers (free items; w line width, h text height)
Top Overlay:
  circle w10: c5325,3915 r18.03
  rectangle: 4177.02,2669.04 4502.02,2679.04
  region: 4171.85,2636.54 4146.85,2636.54 4146.85,2611.54 4171.85,2611.54
  region: 4202.02,2679.04 4181.54,2693.38 4160.16,2662.83 4180.64,2648.49
  rectangle: 4225,2680 4250,2705
  rectangle: 4280,2875 4315,3070
  rectangle: 4280,3355 4315,3530
  lines w10: 4120,2830 4290,2830 ; 4125,3020 4280,3020 ; 4125,3480 4295,3480 ; 4135,3290 4290,3290 ; 5165,3900 5150,3915 ; 5165,3930 5150,3915 ; 5310,4080 5325,4095 ; 5340,4080 5325,4095 ; 5150,3915 5325,3915 5325,4095
  lines w20: 4172.02,2619.04 cw(c4240,2616.99) 4240,2685
  text "CAN1" at 3925,4620 h40 r90
  text "CAN2" at 4895,4605 h40 r90
  text "G+" at 5665,4580 h40 r90
  text "G+" at 4685,4570 h40 r90
  text "LH" at 5635,4540 h40
  text "LH" at 4655,4530 h40
  text "LHG+" at 4445,4455 h40 r90
  text "-+CD" at 5805,4275 h40 r270
  text "S+G" at 3795,4100 h40 r90
  text "Y" at 5275,4080 h40
  text "X" at 5180,3930 h40
  text "-+PM" at 5805,3905 h40 r270
  text "+G" at 4030,3810 h40 r270
  text "+G" at 4275,3805 h40 r270
  text "+GBA" at 3790,3710 h40 r90
  text "+SG" at 4160,3565 h40 r90
  text "+ G" at 5995,3455 h40 r270
  text "+GTR" at 3800,3360 h40 r90
  text "V-+" at 5390,3340 h40 r270
  text "+SG" at 4170,3105 h40 r90
  text "+GTR" at 3795,2845 h40 r90
  text "G CL SO SI" at 4485,2780 h40
  text "BotHub-Core" at 4195,2565 h140
  text "V1.0" at 4990,2565 h40
  text "5V" at 5650,2560 h40

## Text inside footprints (layer, text, board x,y; h text height)
BEEP?: Top Overlay "+" at 4376,3821 h40 r90
PIO: Top Overlay "2" at 3920,2940 h50 r90; Top Overlay "1" at 4020,2960 h50 r90; Top Overlay "9" at 4020,3500 h50 r90; Top Overlay "10" at 3920,3500 h50 r90